# Altium PCB Mainboard V1.PcbDoc
Units mm, origin at the board's own origin, x right, y up, seen from the top; angles counter-clockwise.
Board outline 98 x 60 mm, 4 copper layers (Top Layer, Inner Layer1, Inner Layer2, Bottom Layer), stack 1.369 mm thick; 82 components, 104 nets, 322 pads, 53 vias.
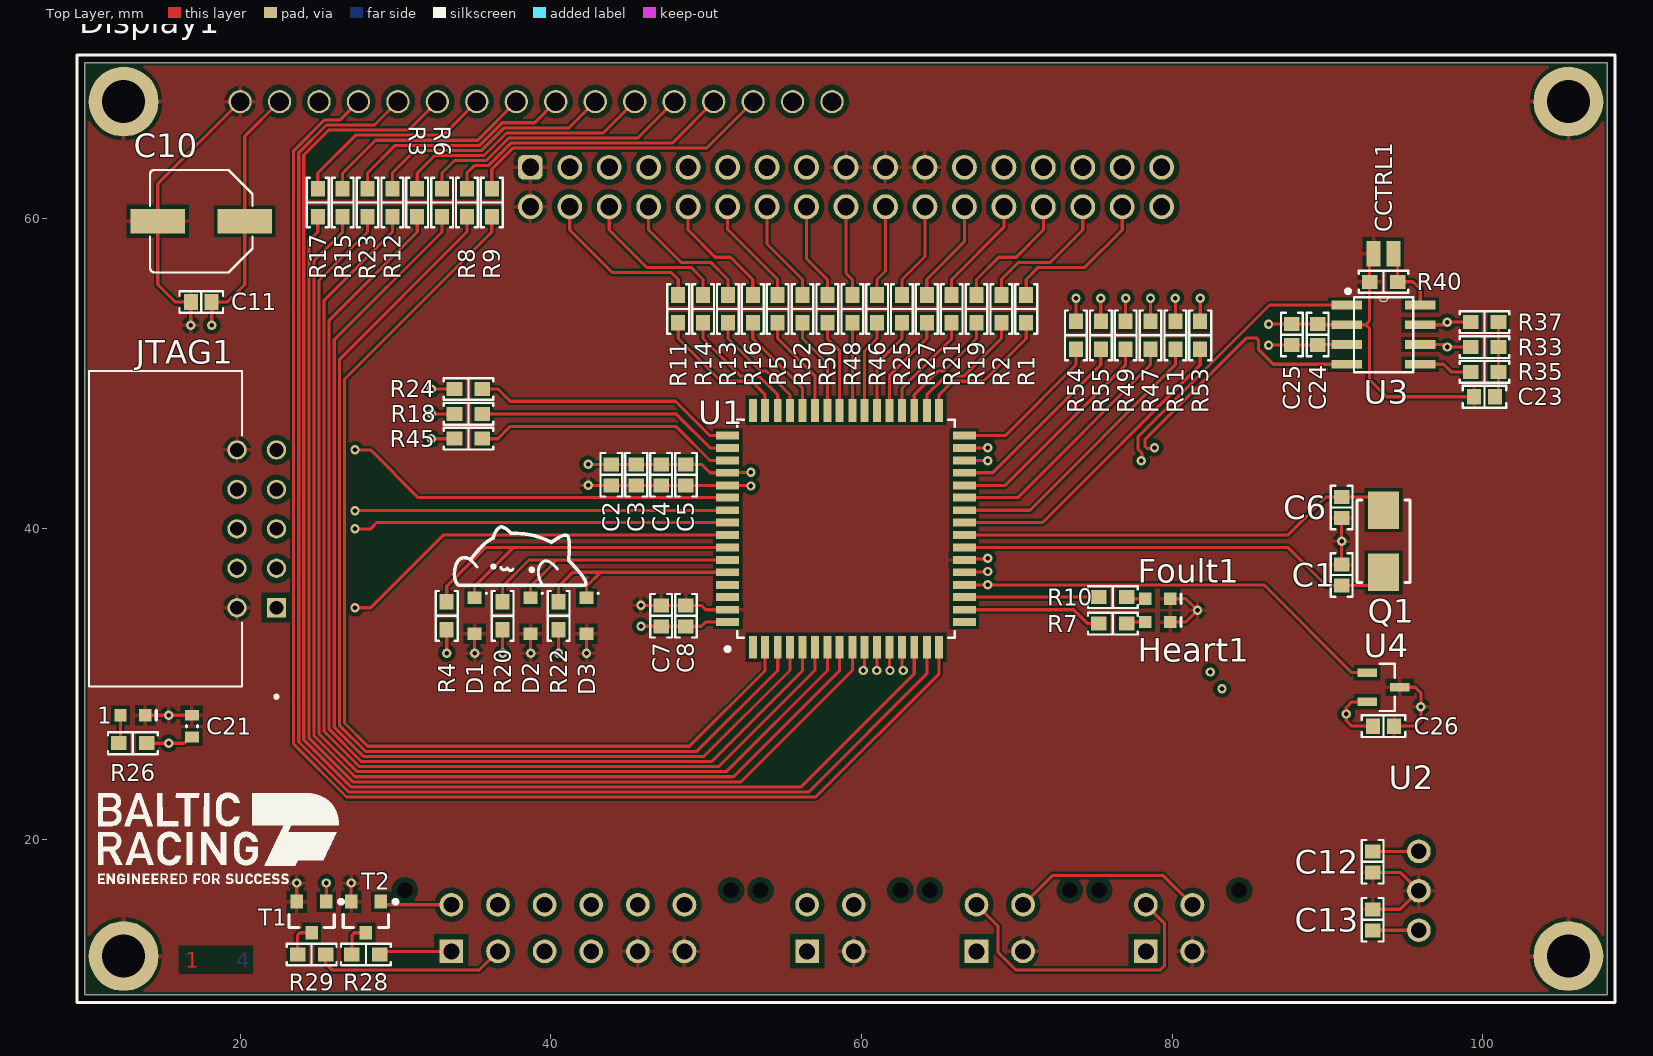
[diagram p0: Top Layer view]
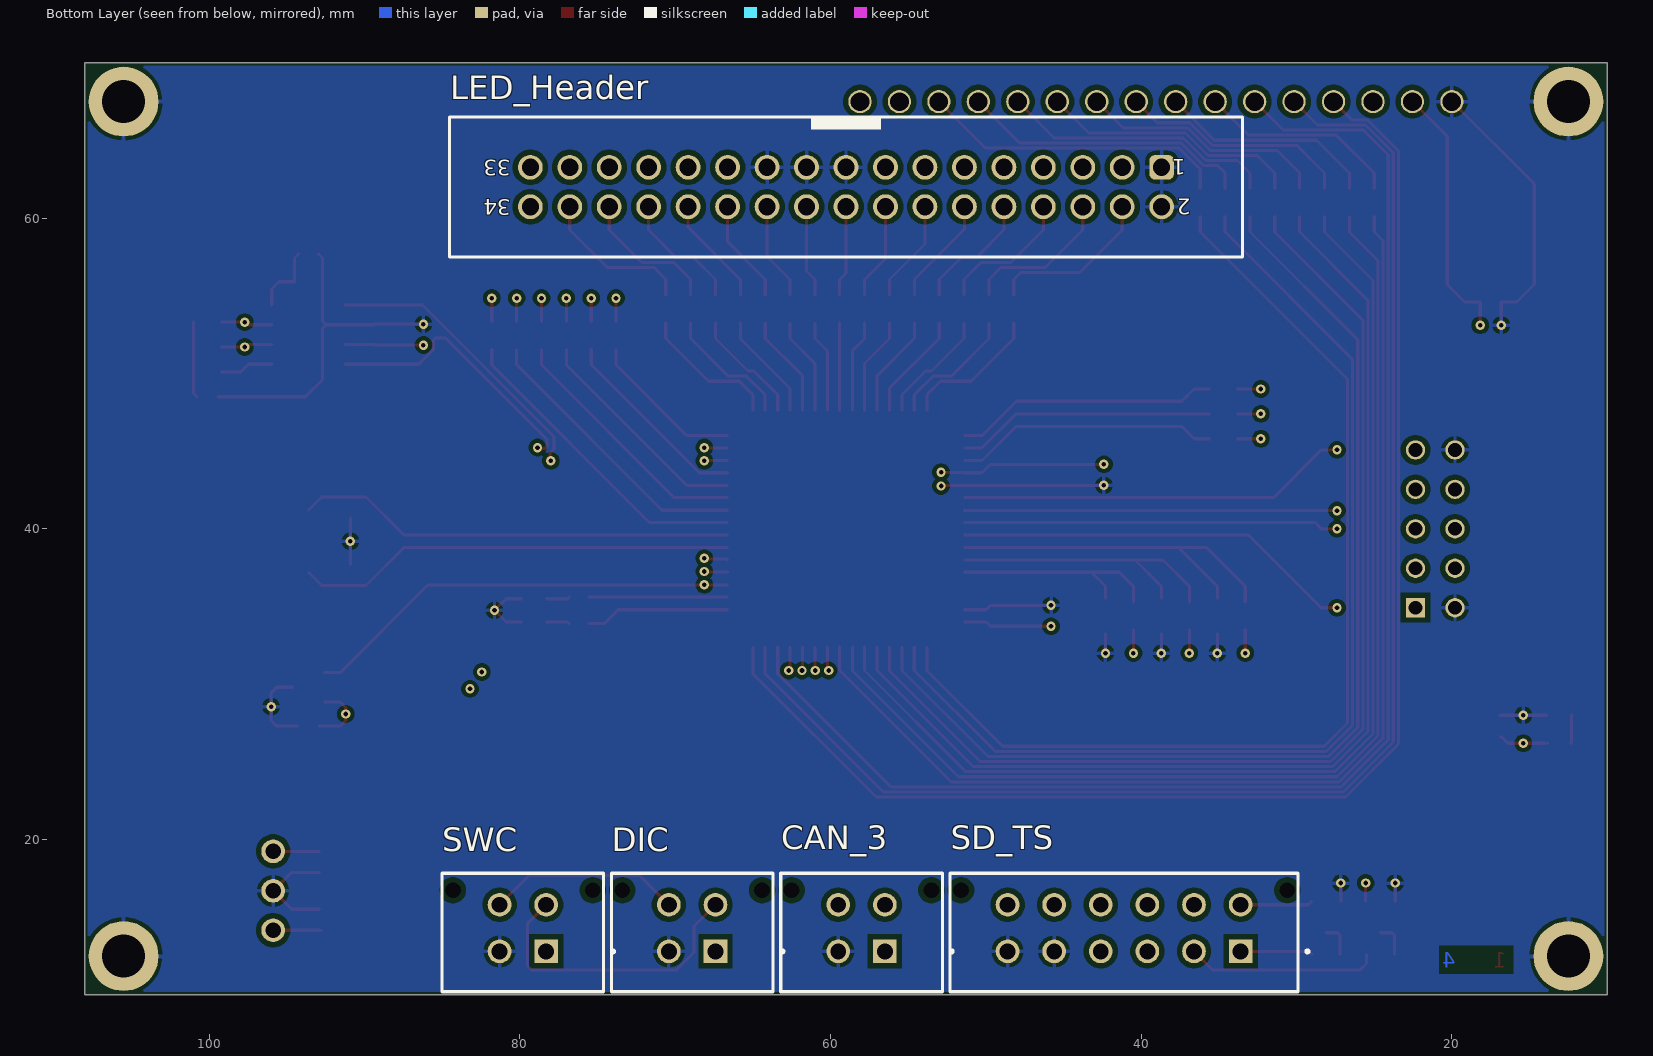
[diagram p1: Bottom Layer view, seen from below]
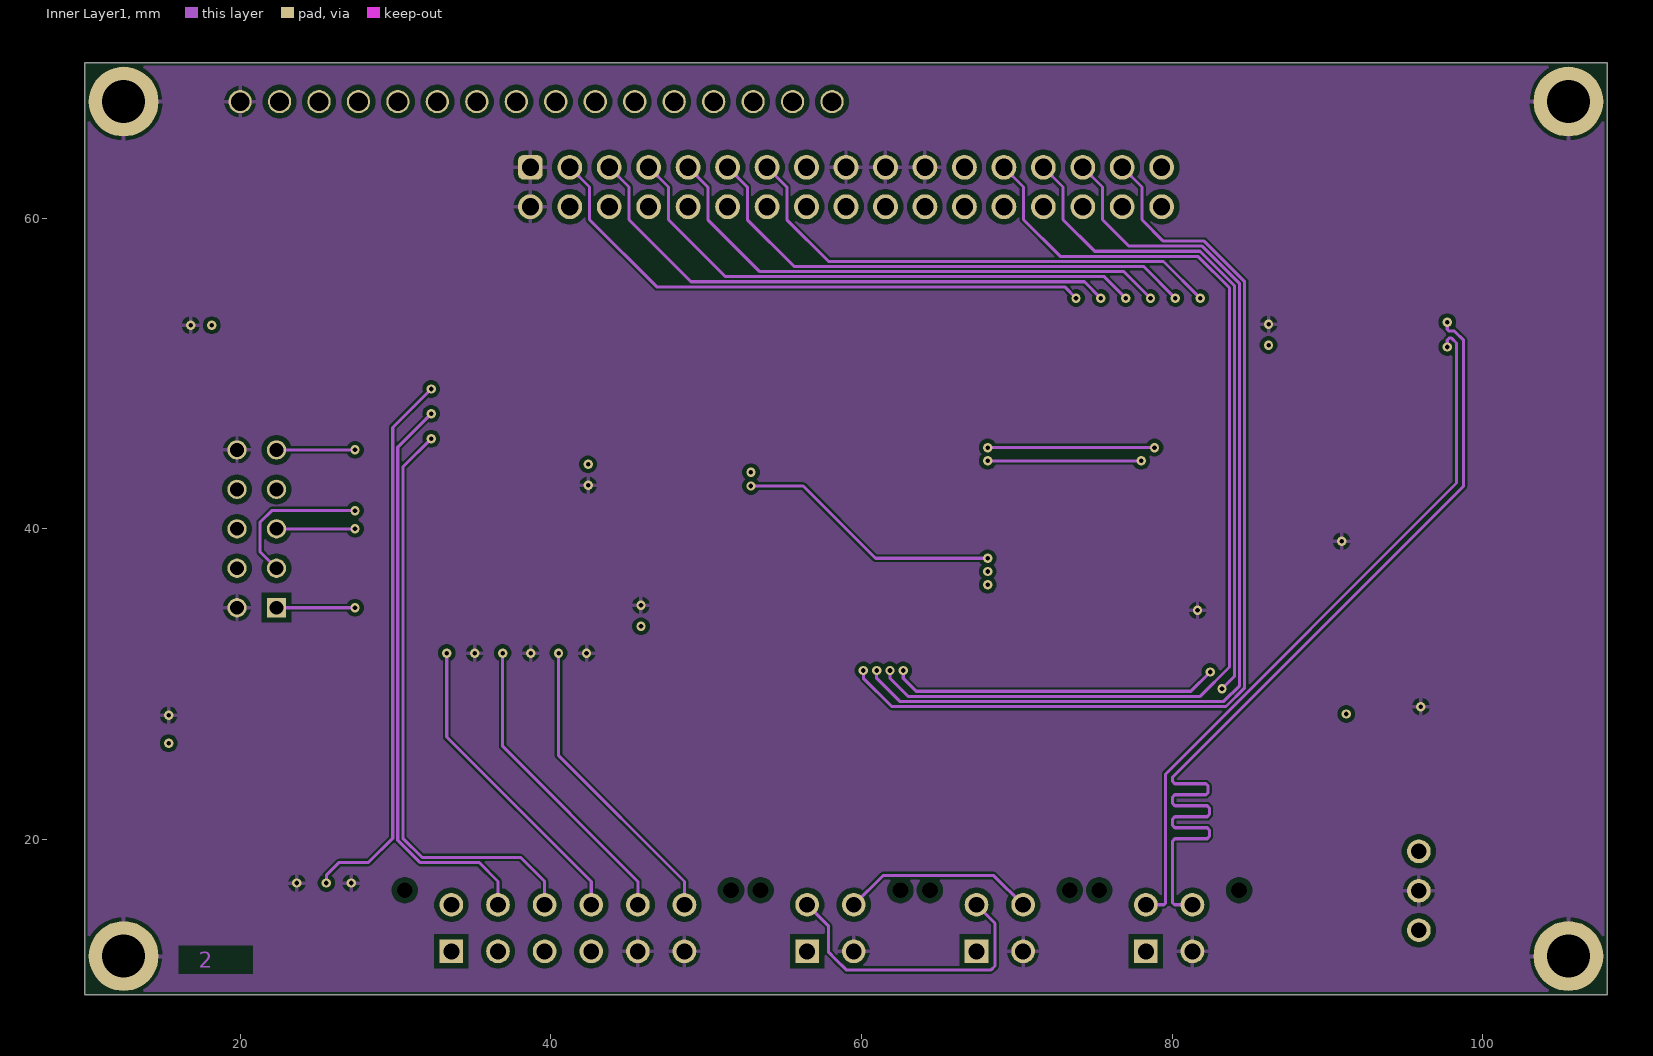
[diagram p2: Inner Layer1]
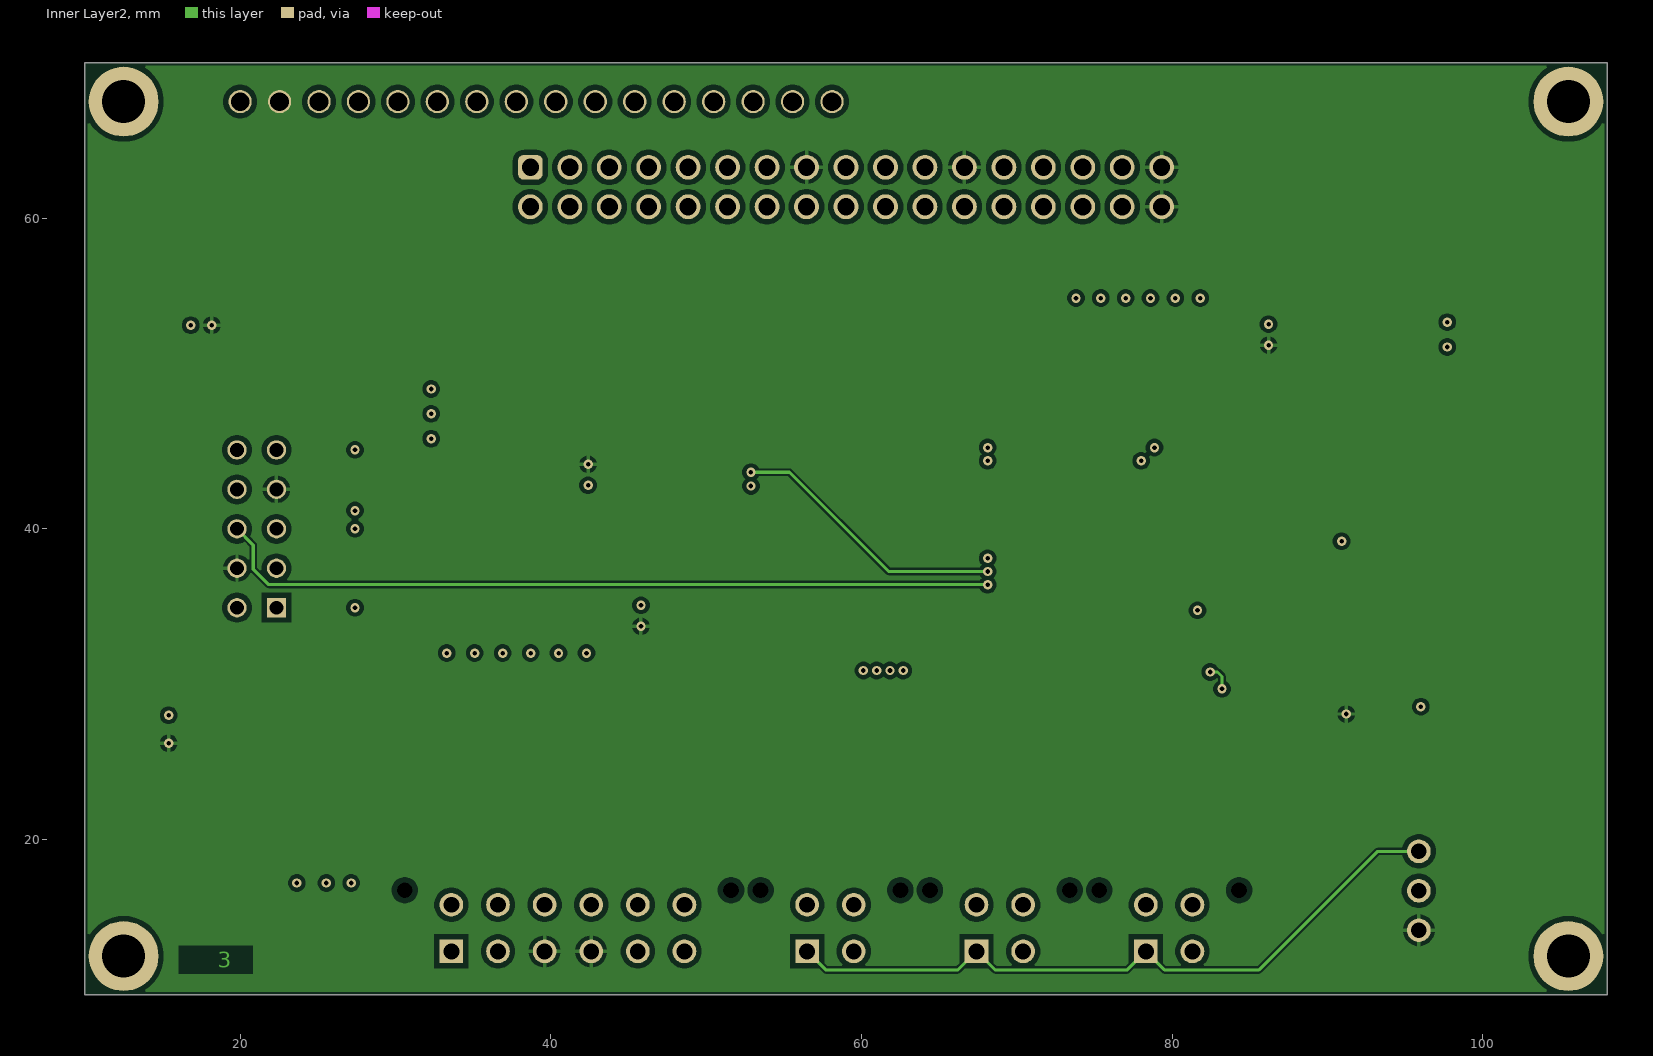
[diagram p3: Inner Layer2]
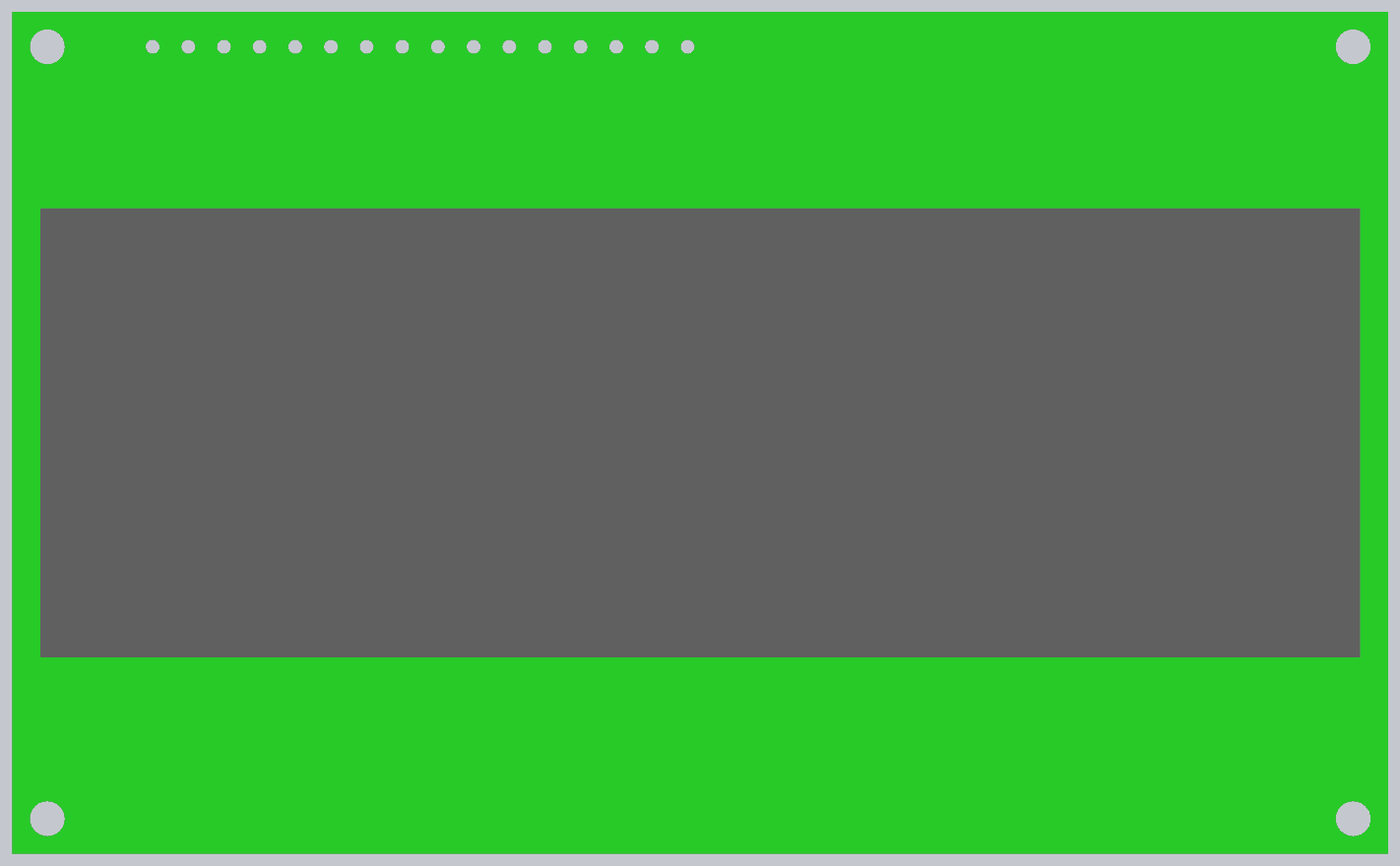
[diagram p4: 3D render of the assembled board from above, using the file's embedded part models]
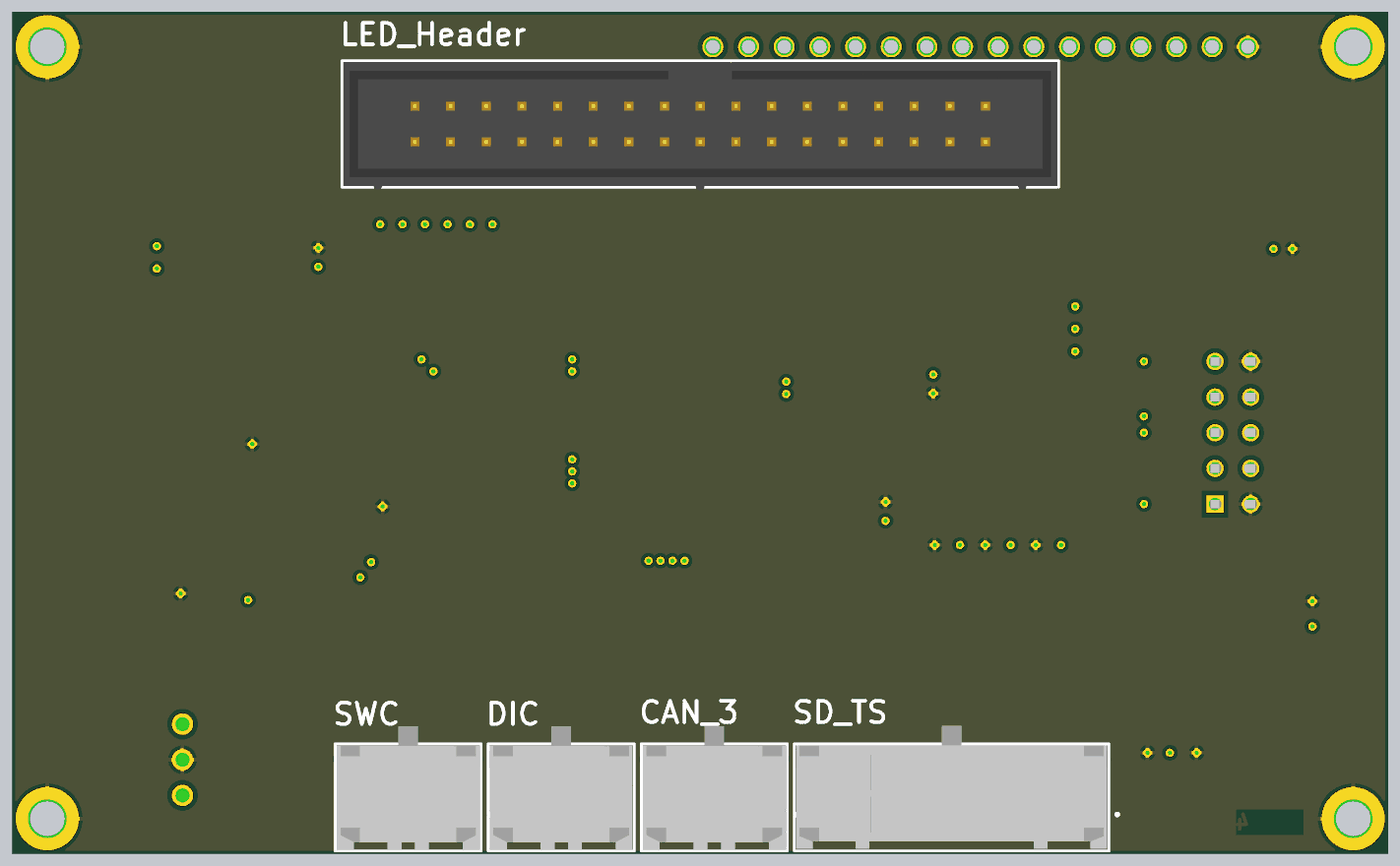
[diagram p5: 3D render of the assembled board from below, using the file's embedded part models]

## Layer stack, top to bottom
Top Solder: solder mask 0.0254, SM-001, Dk 4
Top Layer: signal copper 0.035
Dielectric 1: prepreg 0.1295, PP-017, Dk 4.3
Dielectric 2: prepreg 0.1295, PP-017, Dk 4.3
Inner Layer1: signal copper 0.035
Dielectric 3: core 0.7112, Core-039, Dk 4.8
Inner Layer2: signal copper 0.035
Dielectric 4: prepreg 0.1295, PP-017, Dk 4.3
Dielectric 5: prepreg 0.1295, PP-017, Dk 4.3
Bottom Layer: signal copper 0.035
Bottom Solder: solder mask 0.0254, SM-001, Dk 4

## Board outline
108,70 10,70 10,10 108,10

## Design rules (kind name [scope] priority, off if disabled: settings)
BoardOutlineClearance [All] p1: gap=0.2 ignorepadtopadclearanceinfootprint=FALSE // Trace to V-cut >0.4mm
Clearance [All] p1: gap=0.254 ignorepadtopadclearanceinfootprint=TRUE except(0: Arc-Hole Track-Hole SMDPad-Hole THPad-Hole Via-Hole Fill-Hole Poly-Hole Region-Hole Text-Hole; 0.127: Arc-Arc Arc-Track Arc-Fill Arc-Poly Arc-Region Track-Track Track-Fill Track-Poly Track-Region SMDPad-SMDPad; 0.15: Arc-Text Track-Text SMDPad-Text THPad-Text Via-Text Fill-Text Poly-Text Region-Text Text-Text; 0.2: Arc-SMDPad Track-SMDPad SMDPad-Fill SMDPad-Poly SMDPad-Region; 0.33: Arc-THPad Track-THPad THPad-Fill THPad-Poly THPad-Region; 0.5: SMDPad-THPad THPad-THPad THPad-Via)
DiffPairsRouting [All] p1: maxlimit=10 minlimit=0.254 mostfreqgap=0.254 toplayer_minwidth=0.127 toplayer_maxwidth=5 toplayer_prefwidth=0.254 midlayer1_minwidth=0.127 midlayer1_maxwidth=5 midlayer1_prefwidth=0.254 midlayer2_minwidth=0.127 midlayer2_maxwidth=5 midlayer2_prefwidth=0.254 bottomlayer_minwidth=0.127 bottomlayer_maxwidth=5 bottomlayer_prefwidth=0.254 maxuncoupledlength=12.7
HoleSize [All] p1: absolutevalues=TRUE maxlimit=6.3 minlimit=0.2 maxpercent=80.000 minpercent=20.000 // Finished hole size tolerance +0.13/-0.08mm
HoleToHoleClearance [All] p1: gap=0.5 allowstackedmicrovias=TRUE
MinimumAnnularRing [All] p1: minimumring=0.13 // 1oz Copper
PolygonConnect [All] p1: connectstyle=Relief reliefconductorwidth=0.254 reliefentries=4 polygonreliefangle="90 Angle" airgapwidth=0.254
RoutingVias [All] p1: holewidth=0.711 width=1.27 viastyle="Through Hole" minholewidth=0.3 minwidth=0.6 maxholewidth=0.711 maxwidth=1.27
SolderMaskExpansion [All] p1: expansion=0.05 istentingtop=FALSE
Width [All] p1: maxlimit=4.5 minlimit=0.09 preferedwidth=0.254 toplayer_minwidth=0.127 midlayer1_minwidth=0.127 midlayer2_minwidth=0.127 minimp=50.000000 maximp=50.000000 favimp=50.000000
27 further rules are at their usual default settings.

## Classes and differential pairs
differential pair uCAN: +uCAN_P -uCAN_N
differential pair CAN: +CAN_P -CAN_N

## Components (designator, comment, footprint, x,y, rotation, side; value= is the part's Value field where it differs from the comment)
1 "150060GS75000" 0603_A 13.1,28 r180 top
C1 "SMD Capacitor" "CAP 0603/1608" 90.9,37.025 r270 top value=18pF
C2 "SMD Capacitor" "CAP 0603/1608" 43.9,43.475 r90 top value=1uF
C3 "SMD Capacitor" "CAP 0603/1608" 45.5,43.475 r90 top value=100nF
C4 "SMD Capacitor" "CAP 0603/1608" 47.1,43.475 r90 top value=1uF
C5 "SMD Capacitor" "CAP 0603/1608" 48.7,43.475 r90 top value=100nF
C6 "SMD Capacitor" "CAP 0603/1608" 90.9,41.375 r90 top value=18pF
C7 "SMD Capacitor" "CAP 0603/1608" 47.1,34.4 r270 top value=1uF
C8 "SMD Capacitor" "CAP 0603/1608" 48.7,34.4 r270 top value=100nF
C10 "865060145006" WCAP-ASLL_6.3x7.7 17.5,59.8 r0 top value=220uF
C11 "SMD Capacitor" "CAP 0603/1608" 17.5,54.6 r180 top value=10uF
C12 "SMD Capacitor" "CAP 0603/1608" 92.9,18.565 r90 top value=2u2
C13 "SMD Capacitor" "CAP 0603/1608" 92.9,14.835 r270 top value=1uF
C21 "CAP 100nF 10V 0603(1608)" CAPC0603(1608)100_L 16.9,27.3 r90 top value=100nF
C23 "SMD Capacitor" "CAP 0603/1608" 100.1,48.5 r180 top value=4,7u
C24 "SMD Capacitor" "CAP 0603/1608" 89.354,52.5 r270 top value=100nF
C25 "SMD Capacitor" "CAP 0603/1608" 87.7,52.5 r270 top value=100nF
C26 "SMD Capacitor" "CAP 0603/1608" 93.6,27.3 r0 top value=1uF
CAN_3 "43045-0412" 43045-0412 58,14.3 r180 bottom
CCTRL1 "SMD Jumper open" SMD-JUMPER-OPEN 93.6,57.7 r0 top
D1 "MM3Z4V7T1G" SOD-323-2 35.1,34.4 r270 top
D2 "MM3Z4V7T1G" SOD-323-2 38.7,34.4 r270 top
D3 "MM3Z4V7T1G" SOD-323-2 42.3,34.4 r270 top
DIC "43045-0412" 43045-0412 68.9,14.3 r180 bottom
Display1 "EA_W204-XLG" EA_W204-XLG 9.5,9.5 r0 top
Foult1 "150060BS75000" 0603_A 79.075,35.5 r180 top
Heart1 "150060BS75000" 0603_A 79.075,34 r180 top
JTAG1 "5103311-1" TE_5103311-1 22.34,34.92 r90 top
LED_Header "61203421621" 61203421621 59,62 r0 bottom
Q1 "16M" "NDK NX5032GA" 93.6,39.2 r270 top
R1 "SMD Resistor" "STACKPOLE CSR0603" 70.6,54.15 r270 top value=1.8k
R2 "SMD Resistor" "STACKPOLE CSR0603" 69,54.15 r270 top value=1.8k
R3 "SMD Resistor" "STACKPOLE CSR0603" 31.4,61 r90 top value=10k
R4 "SMD Resistor" "STACKPOLE CSR0603" 33.3,34.4 r90 top value=10k
R5 "SMD Resistor" "STACKPOLE CSR0603" 54.6,54.15 r270 top value=390
R6 "SMD Resistor" "STACKPOLE CSR0603" 33,61 r90 top value=10k
R7 "SMD Resistor" "STACKPOLE CSR0603" 76.175,33.9 r0 top value=1.8k
R8 "SMD Resistor" "STACKPOLE CSR0603" 34.6,61 r270 top value=10k
R9 "SMD Resistor" "STACKPOLE CSR0603" 36.2,61 r270 top value=10k
R10 "SMD Resistor" "STACKPOLE CSR0603" 76.175,35.6 r0 top value=1.8k
R11 "SMD Resistor" "STACKPOLE CSR0603" 48.2,54.15 r90 top value=390
R12 "SMD Resistor" "STACKPOLE CSR0603" 29.8,61 r270 top value=10k
R13 "SMD Resistor" "STACKPOLE CSR0603" 51.4,54.15 r90 top value=390
R14 "SMD Resistor" "STACKPOLE CSR0603" 49.8,54.15 r90 top value=390
R15 "SMD Resistor" "STACKPOLE CSR0603" 26.6,61 r270 top value=10k
R16 "SMD Resistor" "STACKPOLE CSR0603" 53,54.15 r90 top value=390
R17 "SMD Resistor" "STACKPOLE CSR0603" 25,61 r270 top value=10k
R18 "SMD Resistor" "STACKPOLE CSR0603" 34.7,47.4 r0 top value=10k
R19 "SMD Resistor" "STACKPOLE CSR0603" 67.4,54.15 r270 top value=1.8k
R20 "SMD Resistor" "STACKPOLE CSR0603" 36.9,34.4 r90 top value=10k
R21 "SMD Resistor" "STACKPOLE CSR0603" 65.8,54.15 r270 top value=1.8k
R22 "SMD Resistor" "STACKPOLE CSR0603" 40.5,34.4 r90 top value=10k
R23 "SMD Resistor" "STACKPOLE CSR0603" 28.2,61 r90 top value=10k
R24 "SMD Resistor" "STACKPOLE CSR0603" 34.7,49 r180 top value=10k
R25 "SMD Resistor" "STACKPOLE CSR0603" 62.6,54.15 r90 top value=1.8k
R26 "SMD Resistor" "STACKPOLE CSR0603" 13.1,26.2 r180 top value=100
R27 "SMD Resistor" "STACKPOLE CSR0603" 64.2,54.15 r90 top value=1.8k
R28 "SMD Resistor" "STACKPOLE CSR0603" 28.1,12.6 r180 top value=270
R29 "SMD Resistor" "STACKPOLE CSR0603" 24.6,12.6 r180 top value=270
R33 "SMD Resistor" "STACKPOLE CSR0603" 100.1,51.7 r0 top value="60 0603"
R35 "SMD Resistor" "STACKPOLE CSR0603" 100.1,50.1 r0 top value="300 0603"
R37 "SMD Resistor" "STACKPOLE CSR0603" 100.1,53.3 r180 top value="60 0603"
R40 "SMD Resistor" "STACKPOLE CSR0603" 93.6,55.9 r0 top
R45 "SMD Resistor" "STACKPOLE CSR0603" 34.7,45.8 r180 top value=10k
R46 "SMD Resistor" "STACKPOLE CSR0603" 61,54.15 r270 top value=470
R47 "SMD Resistor" "STACKPOLE CSR0603" 81.8,52.45 r90 top value=560
R48 "SMD Resistor" "STACKPOLE CSR0603" 59.406,54.15 r270 top value=470
R49 "SMD Resistor" "STACKPOLE CSR0603" 78.6,52.45 r270 top value=560
R50 "SMD Resistor" "STACKPOLE CSR0603" 57.8,54.15 r270 top value=560
R51 "SMD Resistor" "STACKPOLE CSR0603" 80.2,52.45 r90 top value=560
R52 "SMD Resistor" "STACKPOLE CSR0603" 56.2,54.15 r270 top value=560
R53 "SMD Resistor" "STACKPOLE CSR0603" 77,52.45 r90 top value=560
R54 "SMD Resistor" "STACKPOLE CSR0603" 73.8,52.45 r90 top value=560
R55 "SMD Resistor" "STACKPOLE CSR0603" 75.4,52.45 r90 top value=560
SD_TS "43045-1212" 43045-1212 41.1,14.3 r180 bottom
SWC "43045-0412" 43045-0412 79.8,14.3 r180 bottom
T1 "BC848BLT1G" ONSC-SOT-23-3-318-08_V 24.6,15 r270 top
T2 "BC848BLT1G" ONSC-SOT-23-3-318-08_V 28.1,15 r270 top
U1 "AT90CAN128-16AI" *QFP80P1600X1600X120-64N 59,40 r90 top
U2 "R-78E05-1.0" SIP3_RECOM 98.123,16.7 r270 top
U3 "MCP2551/2561" *SOIC127P600X175-8N 93.6,52.5 r0 top
U4 "MCP130T-450I/TT" *SOT95P237X112-3N 93.6,29.8 r270 top

## Footprints (in the part's own frame and the unit in brackets; to place one, negate y for a bottom-side part, rotate by r counter-clockwise, add the part's x,y. Pads: shape width x height; smd on the part's side, far side on the other; paste and mask are expansions set on the pad)
0603_A [mm] "Chip LED, 2-Leads, Body 1.6x0.8mm, IPC Medium Density"
  rect 0.8x0.8 smd: 1(-0.8,0) 2(0.8,0)
  silkscreen extent -1.5,-0.3 -1.5,0.3, body extent -0.8,-0.4 0.8,0.4, height 0.7
43045-0412 [mm]
  rect 1.524x1.524 hole 1.02: 1(1.5,-1.5)
  round 1.524 hole 1.02: 2(-1.5,-1.5) 3(1.5,1.5) 4(-1.5,1.5)
  round 0 hole 1.02 unplated: ""(-4.5,2.44) ""(4.5,2.44)
  silkscreen extent -5.2,-4.1 5.9,3.53, body extent -5.07,-3.97 5.08,4.8, height 9.95
43045-1212 [mm]
  rect 1.524x1.524 hole 1.02: 1(7.5,-1.5)
  round 1.524 hole 1.02: 2(4.5,-1.5) 3(1.5,-1.5) 4(-1.5,-1.5) 5(-4.5,-1.5) 6(-7.5,-1.5) 7(7.5,1.5) 8(4.5,1.5) 9(1.5,1.5) 10(-1.5,1.5) 11(-4.5,1.5) 12(-7.5,1.5)
  round 0 hole 1.02 unplated: ""(-10.5,2.44) ""(10.5,2.44)
  silkscreen extent -11.2,-4.1 11.9,3.53, body extent -11.07,-3.94 11.07,4.83, height 9.95
61203421621 [mm] "34 pins, straight, gold plating"
  rrect50% 1.6x1.6 hole 1.1: 1(-20.32,-1.27)
  round 1.6 hole 1.1: 2(-20.32,1.27) 3(-17.78,-1.27) 4(-17.78,1.27) 5(-15.24,-1.27) 6(-15.24,1.27) 7(-12.7,-1.27) 8(-12.7,1.27) 9(-10.16,-1.27) 10(-10.16,1.27) 11(-7.62,-1.27) 12(-7.62,1.27) 13(-5.08,-1.27) 14(-5.08,1.27) 15(-2.54,-1.27) 16(-2.54,1.27) 17(0,-1.27) 18(0,1.27) 19(2.54,-1.27) 20(2.54,1.27) 21(5.08,-1.27) 22(5.08,1.27) 23(7.62,-1.27) 24(7.62,1.27) 25(10.16,-1.27) 26(10.16,1.27) 27(12.7,-1.27) 28(12.7,1.27) 29(15.24,-1.27) 30(15.24,1.27) 31(17.78,-1.27) 32(17.78,1.27) 33(20.32,-1.27) 34(20.32,1.27)
  silkscreen extent -25.52,-4.5 25.52,4.5, body extent -25.42,-4.42 25.42,4.75, height 9.13
*QFP80P1600X1600X120-64N [mil]
  rect 58x20 smd: 1(-300,236) 2(-300,205) 3(-300,173) 4(-300,142) 5(-300,110) 6(-300,79) 7(-300,47) 8(-300,16) 9(-300,-16) 10(-300,-47) 11(-300,-79) 12(-300,-110) 13(-300,-142) 14(-300,-173) 15(-300,-205) 16(-300,-236) 33(300,-236) 34(300,-205) 35(300,-173) 36(300,-142) 37(300,-110) 38(300,-79) 39(300,-47) 40(300,-16) 41(300,16) 42(300,47) 43(300,79) 44(300,110) 45(300,142) 46(300,173) 47(300,205) 48(300,236)
  rect 20x58 smd: 17(-236,-300) 18(-205,-300) 19(-173,-300) 20(-142,-300) 21(-110,-300) 22(-79,-300) 23(-47,-300) 24(-16,-300) 25(16,-300) 26(47,-300) 27(79,-300) 28(110,-300) 29(142,-300) 30(173,-300) 31(205,-300) 32(236,-300) 49(236,300) 50(205,300) 51(173,300) 52(142,300) 53(110,300) 54(79,300) 55(47,300) 56(16,300) 57(-16,300) 58(-47,300) 59(-79,300) 60(-110,300) 61(-142,300) 62(-173,300) 63(-205,300) 64(-236,300)
  silkscreen extent -310,-276 276,305, body extent -270,-270 270,270, height 30
*SOIC127P600X175-8N [mil]
  rect 78x22 smd: 1(-93,75) 2(-93,25) 3(-93,-25) 4(-93,-75) 5(93,-75) 6(93,-25) 7(93,25) 8(93,75)
  silkscreen extent -95,-95 75,115, body extent -75,-95 75,95, height 80
*SOT95P237X112-3N [mil]
  rect 22x50 smd: 1(-37,-41) 2(37,-41) 3(0,41)
  silkscreen extent -60,-10 60,28, body extent -60,-25 60,25, height 50
"CAP 0603/1608" [mm] "Chip Capacitor, 2-Leads, Body 1.60x0.80mm, IPC Medium Density"
  rect 0.9x1 smd: 1(-0.675,0) 2(0.675,0)
  silkscreen extent -1.4,-0.7 1.4,0.7, body extent -0.8,-0.41 0.8,0.41, height 0.82
CAPC0603(1608)100_L [mm] "Chip Capacitor, Body 1.6x0.8mm, Height 1.0mm, IPC High Density"
  rect 0.7x0.9 smd: 1(-0.7,0) 2(0.7,0)
  silkscreen extent -0.05,-0.35 0.05,0.35, body extent -0.87,-0.47 0.88,0.48, height 1
EA_W204-XLG [mm] "Display"
  round 1.5 hole 1.2: 1(10.5,58) 2(13.04,58) 3(15.58,58) 4(18.12,58) 5(20.66,58) 6(23.2,58) 7(25.74,58) 8(28.28,58) 9(30.82,58) 10(33.36,58) 11(35.9,58) 12(38.44,58) 13(40.98,58) 14(43.52,58) 15(46.06,58) 16(48.6,58)
  round 3.5 hole 2.75: NC(3,3) NC(3,58) NC(96,3) NC(96,58)
  silkscreen extent 0,0 99,61, body extent 0.5,0.5 98.5,60.5, height 17.4
"NDK NX5032GA" [mm] "Crystal, 2-Leads, Body 5.00x3.20mm, IPC Medium Density"
  rect 2.4x2 smd: 1(-2,0) 2(2,0)
  silkscreen extent -2.65,-1.7 2.65,1.7, body extent -2.5,-1.6 2.5,1.6, height 1.2
ONSC-SOT-23-3-318-08_V [mm]
  rect 0.9x0.8 smd: 1(-1,0.95) 2(-1,-0.95) 3(1,0)
  silkscreen extent -1.12,-1.46 0.65,2.03, body extent -0.65,-1.46 0.65,1.46, height 1.11
SIP3_RECOM [mm]
  round 1.524 hole 1: 1(-2.54,-2.25) 2(0,-2.25) 3(2.54,-2.25)
  body extent -5.75,-4.25 5.75,4.25, height 10.4
SMD-JUMPER-OPEN [mm] "Jumper, SMD"
  rect 0.9x1.65 smd: 1(-0.635,0) 2(0.635,0)
SOD-323-2 [mm] "SODFL, 2-Leads, Body 1,30x2,50mm, IPC Low Density"
  rect 0.8x0.9 smd: 1C(-1.15,0) 2A(1.15,0)
  silkscreen extent -1.5,0.7 -1.4,0.8, body extent -1.25,-0.72 1.25,0.72, height 1.15
"STACKPOLE CSR0603" [mm] "Chip Resistor, 2-Leads, Body 1.60x0.80mm, IPC Medium Density"
  rect 1x0.9 smd: 1(-0.9,0) 2(0.9,0)
  silkscreen extent -1.6,-0.7 1.6,0.7, body extent -0.85,-0.4 0.85,0.4, height 0.45
TE_5103311-1 [mm]
  rect 1.24x1.24 hole 0.89: 1(0,0)
  round 1.24 hole 0.89: 2(0,2.54) 3(2.54,0) 4(2.54,2.54) 5(5.08,0) 6(5.08,2.54) 7(7.62,0) 8(7.62,2.54) 9(10.16,0) 10(10.16,2.54)
  silkscreen extent -5.83,-0.1 15.24,12.08, body extent -5.08,-0.31 15.24,12.14, height 9.14
WCAP-ASLL_6.3x7.7 [mm] "Aluminium Electrolytic V-Chip SMT Capacitors, §¶6.3x7.7mm"
  rect 3.5x1.6 smd: 1(2.8,0) 2(-2.8,0)
  silkscreen extent -3.3,-3.3 3.3,3.3, body extent -3.65,-3.3 3.65,3.3, height 7.7

## Part data
1: library part CMP-1426-00002-1, "SMD mono-color Chip LED, WL-SMCW, Green", Color=Green, Manufacturer="Wuerth Elektronik", ComponentLink1Description="Manufacturer URL", ComponentLink1URL=http://www.we-online.com, ComponentLink2Description=Datasheet, ComponentLink2URL=http://katalog.we-online.com/led/datasheet/150060GS75000.pdf, PackageReference=0603_A, PartNumber=150060GS75000
C1 C2 C3 C4 C5 C6 C7 C8 C11 C12 C13 C23 C24 C25 C26: "Capacitor with multiple Footprints"
C10: "WCAP-ASLL Aluminum Electrolytic Capacitors, size Ф6.3x7.7mm, 6.3V DC, 220uF", Operating Temperature="-55 °C up to +105 °C", Rated Voltage="6.3V DC", ComponentLink1Description=Manufacturer, ComponentLink1URL=http://www.we-online.de, ComponentLink2Description=Datasheet, ComponentLink2URL=http://katalog.we-online.de/pbs/datasheet/865060145006.pdf, Life Cycle=2000h, Part Number=865060145006, Published Date="June 2017", Publisher="Wurth Elektronik", Size=Ф6.3x7.7mm
C21: library part CMP-1035-02579-1, "CAP 100nF 10V ±5% 0603 (1608 Metric) Thickness 1mm SMD", Case-EIA=0603, Case-Metric=1608, Rated Voltage="10 V", Tolerance=Â±5%, Max Thickness="1 mm", Technology=SMT
CAN_3 DIC SWC: "Micro-Fit 3.0 Vertical Header, 3.00mm Pitch, Dual Row, 4 Circuits, with PCB Polarizing Peg, Tin, Glow-Wire Capable, Black"
D1 D2 D3: "onsemi MM3Z4V7T1G / Z-Diode, 4,7V", ComponentLink1Description=Octopart, ComponentLink1URL=https://octopart.com/mm3z4v7t1g-onsemi-331144?r=sp
Display1: "Display"
Foult1: library part CMP-1426-00003-1, "SMD mono-color Chip LED, WL-SMCW, Blue", Color=Red, Manufacturer="Wuerth Elektronik", ComponentLink1Description="Manufacturer URL", ComponentLink1URL=http://www.we-online.com, ComponentLink2Description=Datasheet, ComponentLink2URL=http://katalog.we-online.com/led/datasheet/150060BS75000.pdf, PackageReference=0603_A, PartNumber=150060BS75000
Heart1: library part CMP-1426-00003-1, "SMD mono-color Chip LED, WL-SMCW, Blue", Color=Blue, Manufacturer="Wuerth Elektronik", ComponentLink1Description="Manufacturer URL", ComponentLink1URL=http://www.we-online.com, ComponentLink2Description=Datasheet, ComponentLink2URL=http://katalog.we-online.com/led/datasheet/150060BS75000.pdf, PackageReference=0603_A, PartNumber=150060BS75000
JTAG1: "AMP-LATCH Pin Header, Low Profile, 10 Pos., Right Angle PCB Mount, .100 X .100", Package=None, Arrow_Electronics-Purchase-URL=https://snapeda.com/shop?store=Arrow+Electronics&id=619176, Availability=Unavailable, Centerline_Pitch="2.54 mm[.1 in]", ComponentLink1Description=Datasheet, ComponentLink1URL=https://www.te.com/commerce/DocumentDelivery/DDEController?Action=showdoc&DocId=Catalog+Section%7F1307819_SECTION_5%7F0908%7Fpdf%7FEnglish%7FENG_CS_1307819_SECTION_5_0908.pdf%7F5103311-1, DigiKey-Purchase-URL=https://snapeda.com/shop?store=DigiKey&id=619176, EU_RoHS_Compliance=Compliant, MF="TE Connectivity", Mouser-Purchase-URL=https://snapeda.com/shop?store=Mouser&id=619176, MP=5103311-1, Number_of_Positions=10, Price=None, Product_Type=Connector, SnapEDA_Link=https://www.snapeda.com/parts/5103311-1/TE%20Connectivity%20AMP%20Connectors/view-part/619176/?ref=snap
LED_Header: "WR-BHD Box Header, Male PCB side, pitch 2.54mm, THT, Straight, 34p", Contact Resistance=20mOhm, Insulation Resistance=1000MOhm, Manufacturer="Wurth Elektronik", Operating Temperature="-40 to +105degC", Rated Current=3A, Withstanding Voltage=500VAC, Working Voltage=250VAC, ComponentLink1Description=Manufacturer, ComponentLink1URL=http://www.we-online.de, ComponentLink2Description=Datasheet, ComponentLink2URL=https://www.we-online.com/catalog/datasheet/61203421621.pdf, Gender="Male PCB side", Length=50.84mm, Manufacturer Part Number=61203421621, Mounting Technology=THT, Packaging=Tray, Pin Number=34, Pitch=2.54mm, Published Date="August 2021", System=Connector, Type=Straight
Q1: library part "16 MHz Quartz", "16 MHz Quartz"
R1 R2 R5 R11 R13 R14 R16 R19 R21 R25 R27 R46 R48 R50 R52: "Resistor with multiple footprints /  / 500R or 1kR depends on luminous intensity"
R3 R4 R6 R7 R8 R9 R10 R12 R15 R17 R18 R20 R22 R23 R24 R26 R28 R29 R33 R35 R37 R40 R45 R47 R49 R51 R53 R54 R55: "Resistor with multiple footprints"
SD_TS: "Micro-Fit 3.0 Vertical Header, 3.00mm Pitch, Dual Row, 12 Circuits, with PCB Polarizing Peg, Tin, Glow-Wire Capable, Black"
T1 T2: library part CMP-1048-00679-1, "General Purpose Transistor, NPN Silicon, 3-Pin SOT-23, Pb-Free, Tape and Reel", Manufacturer="On Semiconductor", Manufacturer 1="ON Semiconductor", ComponentLink1Description="Manufacturer URL", ComponentLink1URL=http://www.onsemi.com/, ComponentLink2Description=Datasheet, ComponentLink2URL=http://www.onsemi.cn/pub_link/Collateral/BC846ALT1-D.PDF, ComponentLink3Description="Package Specification", ComponentLink3URL=http://www.onsemi.cn/pub_link/Collateral/318-08.PDF, DatasheetVersion="Rev. 11", fT Min (MHz)=100, IC Continuous (A)=0.1, Manufacturer Part Number 1=BC848BLT1G, Mounting Technology="Surface Mount", PackageDescription="3-Pin Small Outline Transistor, Body 2.92 x 1.3 mm, Pitch 0.95 mm", PackageReference=SOT-23-3-318-08, PackageVersion="Rev. AP, 11/2009", Packing="Tape and Reel", PartNumber=BC848BLT1G, Polarity=NPN, RoHS=TRUE
U1: "Ic Mcu 8bit 128kb Flash 64tqfp", Package="TQFP-64 Microchip", Availability=Unavailable, ComponentLink1Description=Datasheet, ComponentLink1URL=https://ww1.microchip.com/downloads/en/DeviceDoc/doc7679.pdf, MF=Microchip, MP=AT90CAN128-16AI, Price=None, SnapEDA_Link=https://www.snapeda.com/parts/AT90CAN128-16AI/Microchip/view-part/?ref=snap
U2: "Nonisolated 5V Switchmode converter", ComponentLink1Description=Datasheet, ComponentLink1URL=https://recom-power.com/pdf/Innoline/R-78E-1.0.pdf
U3: library part MCP2551-I/SN, "MCP2551 Series 5.5 V 1 Mb/s Surface Mount High-Speed CAN Transceiver - SOIC-8", Package="SOIC-8 Microchip", Availability=Unavailable, ComponentLink1Description=Datasheet, ComponentLink1URL=http://ww1.microchip.com/downloads/en/devicedoc/20001667g.pdf, MF=Microchip, MP=MCP2551-I/SN, Price=None, SnapEDA_Link=https://www.snapeda.com/parts/MCP2551-I/SN/Microchip/view-part/?ref=snap
U4: "System Supervisors - Power Supply Monitors with Reset Generators Open Drain Low", Package="SOT-23-3 Microchip", Availability=Unavailable, ComponentLink1Description=Datasheet, ComponentLink1URL=https://ww1.microchip.com/downloads/en/DeviceDoc/11184d.pdf, MF=Microchip, MP=MCP120T-450I/TT, Price=None, SnapEDA_Link=https://www.snapeda.com/parts/MCP120T-450I/TT/Microchip/view-part/?ref=snap

## Free pads (board coordinates)
  round 4.5 hole 2.7: 6(12.5,12.5) 7(12.5,67.5) 8(105.5,67.5) 9(105.5,12.5)

## Via types
v1: diameter 0.6, hole 0.3, Top Layer to Bottom Layer, 53 vias

## Nets (pads, with @x,y where several pads share a name; then routed paths per layer and width w, separated by ;. In a path a pad name is that pad's centre, name@x,y a point inside that pad or via, vN(x,y) a via of type N, cw(c..) or ccw(c..) an arc to the next point about the centre after c; other vN are vias at no path point)
+5V: C2.2 C3.2 C4.2 C5.2 C7.2 C8.2 C10.1 C11.1 C13.2 C21.1 C24.2 C25.2 C26.1 Display1.2 JTAG1.4 JTAG1.7 LED_Header.15 LED_Header.23 LED_Header.33 LED_Header.34 R26.1 SD_TS.3 SD_TS.4 U1.21 U1.52 U1.64 U2.3 U3.3 U4.2 | length 67.9
  Top Layer w0.2: R26.1 v1(15.4,26.2) 16.4,26.2 16.8,26.6 C21.1 ; v1(18.175,53.1) C11.1 19.175,54.6 20.3,55.725 C10.1 20.3,65.26 Display1.2 ; v1(42.4,44.15) C2.2 C3.2 C4.2 C5.2 49.7,44.15 50.243,43.607 U1.52 51.397,43.624 52.863,43.624 v1(52.88,43.641) ; v1(45.8,33.725) C7.2 C8.2 49.7,33.725 49.981,34.006 U1.64 ; U1.21 66.641,37.227 68.099,37.227 v1(68.12,37.248) ; v1(86.2,51.825) C25.2 C24.2 89.394,51.865 U3.3 ; U4.2 91.559,28.86 91.2,28.501 v1(91.2,28.08) 91.2,27.659 91.559,27.3 C26.1 ; C13.2 U2.3
  Inner Layer2 w0.2: v1(52.88,43.641) 55.359,43.641 61.752,37.248 v1(68.12,37.248)
+24V: C12.2 CAN_3.1 DIC.1 SWC.1 U2.1 | length 48
  Top Layer w0.2: C12.2 U2.1
  Inner Layer2 w0.2: CAN_3.1 57.692,11.608 66.208,11.608 DIC.1 68.592,11.608 77.108,11.608 SWC.1 79.492,11.608 85.59,11.608 93.222,19.24 U2.1
batt_led_1: LED_Header.14 R52.1 | length 6.6
  Top Layer w0.2: LED_Header.14 53.92,58.33 56.2,56.05 R52.1
batt_led_2: LED_Header.16 R50.1 | length 6.2
  Top Layer w0.2: LED_Header.16 56.46,57.39 57.8,56.05 R50.1
batt_led_3: LED_Header.18 R48.1 | length 5.8
  Top Layer w0.2: LED_Header.18 59,56.456 59.406,56.05 R48.1
batt_led_4: LED_Header.20 R46.1 | length 5.9
  Top Layer w0.2: R46.1 61,56.05 61.54,56.59 LED_Header.20
batt_led_5: LED_Header.22 R25.2 | length 6.3
  Top Layer w0.2: R25.2 62.6,56.05 64.08,57.53 LED_Header.22
batt_led_6: LED_Header.24 R27.2 | length 6.7
  Top Layer w0.2: R27.2 64.2,56.05 66.62,58.47 LED_Header.24
batt_led_7: LED_Header.26 R21.1 | length 7.1
  Top Layer w0.2: R21.1 65.8,56.05 69.16,59.41 LED_Header.26
batt_led_8: LED_Header.28 R19.1 | length 8.1
  Top Layer w0.2: R19.1 67.4,56.05 68.831,57.481 69.951,57.481 71.7,59.23 LED_Header.28
batt_led_9: LED_Header.30 R2.1 | length 9.1
  Top Layer w0.2: R2.1 69,56.05 70.104,57.154 72.164,57.154 74.24,59.23 LED_Header.30
batt_led_10: LED_Header.32 R1.1 | length 10
  Top Layer w0.2: R1.1 70.6,56.05 71.377,56.827 74.377,56.827 76.78,59.23 LED_Header.32
BOTS_in: R4.1 SD_TS.10 | length 21.6
  Top Layer w0.2: v1(33.3,32) R4.1
  Inner Layer1 w0.2: v1(33.3,32) 33.3,26.6 42.6,17.3 SD_TS.10
BOTS_uC: D1.1C R4.2 U1.58 | length 24.4
  Top Layer w0.2: R4.2 33.3,36.3 35.806,38.806 37.606,38.806 ; D1.1C 35.1,36.3 37.606,38.806 ; U1.58 37.606,38.806
CAN_N: CAN_3.4 DIC.4 R37.2 SWC.4 U3.7 | length 88.4
  Top Layer w0.2: DIC.4 72.28,17.68 79.42,17.68 SWC.4 ; U3.7 97.427,53.135 97.592,53.3 v1(97.7,53.3) R37.2
  Inner Layer1 w0.2: CAN_3.4 61.38,17.68 68.52,17.68 DIC.4 ; SWC.4 80.144,15.8 80.027,15.917 80.027,19.1 80.027,19.908 80.169,20.05 82.249,20.05 82.391,20.191 82.391,20.616 82.249,20.758 80.169,20.758 80.027,20.899 80.027,21.324 80.169,21.466 82.249,21.466 82.391,21.607 82.391,22.032 82.249,22.174 80.169,22.174 80.027,22.315 80.027,22.74 80.169,22.882 82.169,22.882 82.31,23.023 82.31,23.448 82.169,23.59 80.169,23.59 80.027,23.731 80.027,24.029 98.754,42.756 98.754,52.144 98.171,52.727 97.817,52.727 97.7,52.844 v1(97.7,53.3)
CAN_P: CAN_3.3 DIC.3 R33.1 SWC.3 U3.6 | length 88.4
  Top Layer w0.2: DIC.3 68.78,14.42 68.78,12.737 69.208,12.309 69.208,12.306 69.906,11.608 79.24,11.608 79.492,11.86 79.492,14.608 SWC.3 ; U3.6 97.427,51.865 97.592,51.7 v1(97.7,51.7) R33.1
  Inner Layer1 w0.2: CAN_3.3 57.88,14.42 57.88,12.737 58.308,12.309 58.308,12.306 59.006,11.608 68.34,11.608 68.592,11.86 68.592,14.608 DIC.3 ; SWC.3 79.456,15.8 79.573,15.917 79.573,24.217 98.3,42.944 98.3,51.956 97.983,52.273 97.817,52.273 97.7,52.156 v1(97.7,51.7)
Display_1: Display1.7 R17.1 | length 13.1
  Top Layer w0.2: R17.1 25,62.9 27.439,65.339 33.079,65.339 Display1.7
Display_2: Display1.8 R15.1 | length 14.1
  Top Layer w0.2: R15.1 26.6,62.9 28.712,65.012 35.292,65.012 Display1.8
Display_3: Display1.9 R23.2 | length 15
  Top Layer w0.2: R23.2 28.2,62.9 29.985,64.685 35.427,64.685 36.877,66.135 38.955,66.135 Display1.9
Display_4: Display1.10 R12.1 | length 16
  Top Layer w0.2: R12.1 29.8,62.9 31.258,64.358 35.563,64.358 37.013,65.808 41.168,65.808 Display1.10
Display_5: Display1.11 R3.2 | length 16.9
  Top Layer w0.2: R3.2 31.4,62.9 32.531,64.031 35.698,64.031 37.148,65.481 43.381,65.481 Display1.11
Display_6: Display1.12 R6.2 | length 17.8
  Top Layer w0.2: R6.2 33,62.9 33.804,63.704 35.834,63.704 37.284,65.154 45.594,65.154 Display1.12
Display_7: Display1.13 R8.1 | length 18.8
  Top Layer w0.2: R8.1 34.6,62.9 35.077,63.377 35.969,63.377 37.419,64.827 47.807,64.827 Display1.13
Display_8: Display1.14 R9.1 | length 19.9
  Top Layer w0.2: R9.1 36.2,63.145 37.555,64.5 50.02,64.5 Display1.14
Enable: Display1.6 U1.14 | length 93
  Top Layer w0.2: Display1.6 30.866,65.666 25.7,65.666 24.1,64.066 24.1,26.413 27.124,23.389 56.116,23.389 63.394,30.667 U1.14
free_led_1: LED_Header.4 R11.2 | length 10.8
  Top Layer w0.2: LED_Header.4 41.22,59.23 43.95,56.5 47.75,56.5 48.2,56.05 R11.2
free_led_2: LED_Header.6 R14.2 | length 9.9
  Top Layer w0.2: LED_Header.6 43.76,59.23 46.163,56.827 49.023,56.827 49.8,56.05 R14.2
free_led_3: LED_Header.8 R13.2 | length 8.9
  Top Layer w0.2: LED_Header.8 46.3,59.23 48.376,57.154 50.296,57.154 51.4,56.05 R13.2
free_led_4: LED_Header.10 R16.2 | length 8
  Top Layer w0.2: LED_Header.10 48.84,59.23 50.589,57.481 51.569,57.481 53,56.05 R16.2
free_led_5: LED_Header.12 R5.1 | length 7
  Top Layer w0.2: LED_Header.12 51.38,59.27 54.6,56.05 R5.1
GND: 1.1 C1.1 C2.1 C3.1 C4.1 C5.1 C6.1 C7.1 C8.1 C10.2 C11.2 C12.1 C13.1 C21.2 C23.2 C24.1 C25.1 C26.2 CAN_3.2 CCTRL1.1 D1.2A D2.2A D3.2A DIC.2 Display1.1 Display1.NC Foult1.1 Heart1.1 JTAG1.2 JTAG1.10 LED_Header.1 LED_Header.2 LED_Header.17 LED_Header.19 LED_Header.21 pad.6 pad.7 pad.8 pad.9 R40.1 SD_TS.5 SD_TS.6 SWC.2 T1.2 T2.2 U1.22 U1.53 U1.63 U2.2 U3.2 U4.3 | length 103.3
  Top Layer w0.2: 1.1 v1(15.4,28) C21.2 ; v1(16.825,53.1) C11.2 15.825,54.6 14.7,55.725 C10.2 14.7,62.2 Display1.1 ; T1.2 v1(23.65,17.2) ; T2.2 v1(27.15,17.2) ; v1(35.1,32) D1.2A ; v1(38.7,32) D2.2A ; v1(42.3,32) D3.2A ; v1(42.4,42.8) C2.1 C3.1 C4.1 C5.1 48.706,42.794 U1.53 51.397,42.777 52.863,42.777 v1(52.88,42.76) ; v1@45.692,35.075 v1(45.8,35.075) C7.1 C8.1 49.7,35.075 49.982,34.793 U1.63 ; U1.22 66.674,38.048 68.066,38.048 v1(68.12,38.102) ; Heart1.1 80.875,34 v1(81.625,34.75) 80.875,35.5 Foult1.1 ; v1(86.2,53.175) C25.1 C24.1 89.394,53.135 U3.2 92.465,53.135 ; C1.1 v1(90.9,39.2) C6.1 ; C13.1 94.683,15.51 U2.2 94.683,17.89 C12.1 ; CCTRL1.1 92.7,57.435 R40.1 92.7,53.37 92.465,53.135 ; C26.2 95.641,27.3 96,27.659 v1(96,28.55) 96,29.441 95.641,29.8 U4.3 ; C23.2 93.8,48.5 92.7,49.6 92.7,52.9 92.465,53.135
  Inner Layer1 w0.2: v1(52.88,42.76) 56.24,42.76 60.898,38.102 v1(68.12,38.102)
Inertia_in: R20.1 SD_TS.11 | length 21.3
  Top Layer w0.2: v1(36.9,32) R20.1
  Inner Layer1 w0.2: v1(36.9,32) 36.9,26 45.6,17.3 SD_TS.11
Inertia_uC: D2.1C R20.2 U1.59 | length 19.3
  Top Layer w0.2: R20.2 36.9,36.3 38.593,37.993 40.393,37.993 ; D2.1C 38.7,36.3 40.393,37.993 ; U1.59 40.393,37.993
info_led_1: LED_Header.13 R47.2 | length 34.1
  Top Layer w0.2: R47.2 v1(81.8,54.85)
  Inner Layer1 w0.2: LED_Header.13 55.19,62 55.19,59.9 57.879,57.211 79.439,57.211 v1(81.8,54.85)
info_led_2: LED_Header.11 R51.2 | length 35
  Top Layer w0.2: R51.2 v1(80.2,54.85)
  Inner Layer1 w0.2: LED_Header.11 52.65,62 52.65,59.9 55.666,56.884 78.166,56.884 v1(80.2,54.85)
info_led_3: LED_Header.9 R49.1 | length 36
  Top Layer w0.2: R49.1 v1(78.6,54.85)
  Inner Layer1 w0.2: LED_Header.9 50.11,62 50.11,59.9 53.453,56.557 76.893,56.557 v1(78.6,54.85)
info_led_4: LED_Header.7 R53.2 | length 36.9
  Top Layer w0.2: R53.2 v1(77,54.85)
  Inner Layer1 w0.2: LED_Header.7 47.57,62 47.57,59.9 51.24,56.23 75.62,56.23 v1(77,54.85)
info_led_5: LED_Header.5 R55.2 | length 37.9
  Top Layer w0.2: R55.2 v1(75.4,54.85)
  Inner Layer1 w0.2: LED_Header.5 45.03,62 45.03,59.9 49.027,55.903 74.347,55.903 v1(75.4,54.85)
info_led_6: LED_Header.3 R54.2 | length 38.8
  Top Layer w0.2: R54.2 v1(73.8,54.85)
  Inner Layer1 w0.2: LED_Header.3 42.49,62 42.49,59.9 46.814,55.576 73.074,55.576 v1(73.8,54.85)
JTAG_TCK: JTAG1.1 U1.57 | length 31
  Top Layer w0.2: v1(27.4,34.92) 28.4,34.92 33.074,39.594 U1.57
  Inner Layer1 w0.2: JTAG1.1 v1(27.4,34.92)
JTAG_TDI: JTAG1.9 U1.54 | length 30.3
  Top Layer w0.2: v1(27.4,45.08) 28.4,45.08 31.473,42.007 U1.54
  Inner Layer1 w0.2: JTAG1.9 v1(27.4,45.08)
JTAG_TDO: JTAG1.3 U1.55 | length 33.8
  Top Layer w0.2: v1(27.4,41.173) 27.41,41.183 51.37,41.183 U1.55
  Inner Layer1 w0.2: JTAG1.3 21.29,38.51 21.29,40.435 22.028,41.173 v1(27.4,41.173)
JTAG_TMS: JTAG1.5 U1.56 | length 29.2
  Top Layer w0.2: v1(27.4,40) 28.4,40 28.806,40.406 U1.56
  Inner Layer1 w0.2: JTAG1.5 v1(27.4,40)
MISO: LED_Header.27 U1.13 | length 67.3
  Top Layer w0.2: U1.13 62.607,30.955 v1(62.682,30.88)
  Inner Layer1 w0.2: v1(62.682,30.88) 62.682,30.38 63.516,29.546 81.199,29.546 v1(82.44,30.787) ; LED_Header.27 72.97,62 72.97,59.9 75.005,57.865 81.785,57.865 84.008,55.642 84.008,30.502 v1(83.203,29.697)
  Inner Layer2 w0.2: v1(82.44,30.787) 82.913,30.787 83.203,30.497 v1(83.203,29.697)
MOSI: LED_Header.25 U1.12 | length 68.5
  Top Layer w0.2: U1.12 61.794,30.914 v1(61.828,30.88)
  Inner Layer1 w0.2: v1(61.828,30.88) 61.828,30.38 62.989,29.219 81.797,29.219 83.681,31.103 83.681,55.506 81.649,57.538 72.792,57.538 70.43,59.9 70.43,62 LED_Header.25
Net1_2: 1.2 R26.2 | length 1.8
  Top Layer w0.2: 1.2 12.3,26.25 R26.2@12.35,26.2
NetC1_2: C1.2 Q1.2 U1.23 | length 28.3
  Top Layer w0.2: U1.23 87.444,38.806 89.9,36.35 C1.2 92.75,36.35 Q1.2
NetC6_2: C6.2 Q1.1 U1.24 | length 28.3
  Top Layer w0.2: U1.24 87.444,39.594 89.9,42.05 C6.2 92.75,42.05 Q1.1
NetC23_1: C23.1 R33.2 R35.2 R37.1 | length 4.9
  Top Layer w0.2: C23.1 101,48.725 R35.2 R33.2 R37.1
NetCCTRL1_2: CCTRL1.2 R40.2 U3.8 | length 4.6
  Top Layer w0.2: CCTRL1.2 94.5,57.435 R40.2 95.5,55.9 95.962,55.438 U3.8
NetFoult1_2: Foult1.2 R10.2 | length 1.5
  Top Layer w0.2: R10.2@76.8,35.6 76.9,35.5 Foult1.2
NetHeart1_2: Heart1.2 R7.2 | length 1.5
  Top Layer w0.2: R7.2@76.8,33.9 76.9,34 Heart1.2
NetR1_2: R1.2 U1.33 | length 9.1
  Top Layer w0.2: U1.33 64.994,48.62 65.874,49.5 67.85,49.5 70.6,52.25 R1.2
NetR2_2: R2.2 U1.34 | length 8.3
  Top Layer w0.2: U1.34 64.207,48.62 65.414,49.827 66.577,49.827 69,52.25 R2.2
NetR3_1: R3.1 U1.5 | length 70.6
  Top Layer w0.2: R3.1 31.4,59.1 25.735,53.435 25.735,27.09 27.801,25.024 50.35,25.024 56.206,30.88 U1.5
NetR5_2: R5.2 U1.43 | length 6.6
  Top Layer w0.2: R5.2 54.6,52.25 56.993,49.857 U1.43
NetR6_1: R6.1 U1.4 | length 69.6
  Top Layer w0.2: R6.1 33,59.1 26.062,52.162 26.062,27.225 27.936,25.351 49.864,25.351 55.393,30.88 U1.4
NetR7_1: R7.1 U1.18 | length 9.3
  Top Layer w0.2: U1.18 73.657,34.793 74.55,33.9 R7.1@75.55,33.9
NetR8_2: R8.2 U1.3 | length 68.7
  Top Layer w0.2: R8.2 34.6,59.1 26.389,50.889 26.389,27.361 28.072,25.678 49.404,25.678 54.606,30.88 U1.3
NetR9_2: R9.2 U1.2 | length 67.7
  Top Layer w0.2: R9.2 36.2,59.1 26.716,49.616 26.716,27.496 28.207,26.005 48.918,26.005 53.793,30.88 U1.2
NetR10_1: R10.1 U1.19 | length 8.9
  Top Layer w0.2: U1.19 75.544,35.606 R10.1@75.55,35.6
NetR11_1: R11.1 U1.47 | length 9.1
  Top Layer w0.2: R11.1 48.2,52.25 50.95,49.5 52.913,49.5 53.793,48.62 U1.47
NetR12_2: R12.2 U1.6 | length 71.5
  Top Layer w0.2: R12.2 29.8,59.1 25.408,54.708 25.408,26.954 27.665,24.697 50.81,24.697 56.993,30.88 U1.6
NetR13_1: R13.1 U1.45 | length 7.5
  Top Layer w0.2: R13.1 51.4,52.25 53.496,50.154 53.859,50.154 55.393,48.62 U1.45
NetR14_1: R14.1 U1.46 | length 8.3
  Top Layer w0.2: R14.1 49.8,52.25 52.223,49.827 53.399,49.827 54.606,48.62 U1.46
NetR15_2: R15.2 U1.8 | length 73.4
  Top Layer w0.2: R15.2 26.6,59.1 24.754,57.254 24.754,26.684 27.395,24.043 51.757,24.043 58.594,30.88 U1.8
NetR16_1: R16.1 U1.44 | length 7
  Top Layer w0.2: R16.1 53,52.25 56.206,49.044 U1.44
NetR17_2: R17.2 U1.9 | length 74.4
  Top Layer w0.2: R17.2 25,59.1 24.427,58.527 24.427,26.548 27.259,23.716 52.242,23.716 59.406,30.88 U1.9
NetR18_2: R18.2 U1.50 | length 16.7
  Top Layer w0.2: R18.2 48.05,47.4 50.243,45.207 U1.50
NetR19_2: R19.2 U1.35 | length 7.5
  Top Layer w0.2: U1.35 63.394,48.62 64.928,50.154 65.304,50.154 67.4,52.25 R19.2
NetR21_2: R21.2 U1.36 | length 7
  Top Layer w0.2: U1.36 62.607,49.057 65.8,52.25 R21.2
NetR23_1: R23.1 U1.7 | length 72.5
  Top Layer w0.2: R23.1 28.2,59.1 25.081,55.981 25.081,26.819 27.53,24.37 51.296,24.37 57.806,30.88 U1.7
NetR24_1: R24.1 U1.49 | length 17
  Top Layer w0.2: R24.1 36.6,49 37.387,48.213 48.024,48.213 50.243,45.994 U1.49
NetR25_1: R25.1 U1.38 | length 6.3
  Top Layer w0.2: U1.38 61.007,50.657 62.6,52.25 R25.1
NetR27_1: R27.1 U1.37 | length 6.6
  Top Layer w0.2: U1.37@61.794,47.606 U1.37 61.794,49.844 64.2,52.25 R27.1
NetR28_2: R28.2 T2.3 | length 2.2
  Top Layer w0.2: R28.2 27.2,13.85 27.35,14 T2.3
NetR29_2: R29.2 T1.3 | length 2.2
  Top Layer w0.2: R29.2 23.7,13.85 23.85,14 T1.3
NetR35_1: R35.1 U3.5 | length 3.4
  Top Layer w0.2: U3.5 97.462,50.595 97.957,50.1 R35.1
NetR45_1: R45.1 U1.51 | length 17
  Top Layer w0.2: R45.1 36.6,45.8 37.397,46.597 48.04,46.597 50.243,44.394 U1.51
NetR46_2: R46.2 U1.39 | length 6
  Top Layer w0.2: U1.39 60.194,51.444 61,52.25 R46.2
NetR47_1: R47.1 U1.25 | length 20.4
  Top Layer w0.2: U1.25 71.656,40.406 81.8,50.55 R47.1
NetR48_2: R48.2 U1.40 | length 5.6
  Top Layer w0.2: U1.40 R48.2
NetR49_2: R49.2 U1.27 | length 16.5
  Top Layer w0.2: U1.27 70.057,42.007 78.6,50.55 R49.2
NetR50_2: R50.2 U1.41 | length 6
  Top Layer w0.2: R50.2 57.8,52.25 58.594,51.456 U1.41
NetR51_1: R51.1 U1.26 | length 18.5
  Top Layer w0.2: U1.26 70.844,41.194 80.2,50.55 R51.1
NetR52_2: R52.2 U1.42 | length 6.3
  Top Layer w0.2: R52.2 56.2,52.25 57.806,50.644 U1.42
NetR53_1: R53.1 U1.28 | length 14.6
  Top Layer w0.2: U1.28 69.244,42.794 77,50.55 R53.1
NetR54_1: R54.1 U1.32 | length 10.1
  Top Layer w0.2: U1.32 69.244,45.994 73.8,50.55 R54.1
NetR55_1: R55.1 U1.29 | length 12.7
  Top Layer w0.2: U1.29 68.457,43.607 75.4,50.55 R55.1
Read_Write: Display1.5 U1.15 | length 92.3
  Top Layer w0.2: Display1.5 28.653,65.993 25.565,65.993 23.773,64.201 23.773,26.277 26.988,23.062 56.602,23.062 64.207,30.667 U1.15
Register_Select: Display1.4 U1.16 | length 91.6
  Top Layer w0.2: Display1.4 26.44,66.32 25.429,66.32 23.446,64.337 23.446,26.142 26.853,22.735 57.062,22.735 64.994,30.667 U1.16
Reset_uC: JTAG1.6 U1.20 U4.1 | length 79
  Top Layer w0.2: U1.20 v1(68.12,36.393) 85.906,36.393 91.559,30.74 U4.1
  Inner Layer2 w0.2: JTAG1.6 20.85,38.95 20.85,37.4 21.84,36.41 68.103,36.41 v1(68.12,36.393)
SCK: LED_Header.29 U1.11 | length 66.7
  Top Layer w0.2: v1(60.973,30.88) 61.007,30.914 U1.11
  Inner Layer1 w0.2: v1(60.973,30.88) 60.973,30.38 62.461,28.892 83.323,28.892 84.335,29.904 84.335,55.777 81.92,58.192 77.218,58.192 75.51,59.9 75.51,62 LED_Header.29
SDB_Dashboard_In: R22.1 SD_TS.12 | length 21.1
  Top Layer w0.2: v1(40.5,32) R22.1
  Inner Layer1 w0.2: v1(40.5,32) 40.5,25.4 48.6,17.3 SD_TS.12
SDB_Dashboard_uC: D3.1C R22.2 U1.60 | length 14.3
  Top Layer w0.2: R22.2 40.5,36.3 41.406,37.206 43.206,37.206 ; D3.1C 42.3,36.3 43.206,37.206 ; U1.60 43.206,37.206
SS: LED_Header.31 U1.10 | length 66.1
  Top Layer w0.2: v1(60.119,30.88) 60.194,30.955 U1.10
  Inner Layer1 w0.2: v1(60.119,30.88) 60.119,30.38 61.934,28.565 83.458,28.565 84.662,29.769 84.662,55.913 82.056,58.519 79.431,58.519 78.05,59.9 78.05,62 LED_Header.31
Start_LED_Ctrl: R24.2 T1.1 | length 38.4
  Top Layer w0.2: T1.1 v1(25.55,17.2) ; v1(32.3,49) R24.2
  Inner Layer1 w0.2: v1(25.55,17.2) 25.55,17.7 26.377,18.527 28.265,18.527 29.823,20.085 29.823,46.523 v1(32.3,49)
Start_LED_Return: R29.1 SD_TS.2 | length 12.3
  Top Layer w0.2: R29.1 25.5,12.016 25.908,11.608 35.408,11.608 SD_TS.2
TS_On_Button: R45.2 SD_TS.9 | length 39.7
  Top Layer w0.2: v1(32.3,45.8) R45.2
  Inner Layer1 w0.2: v1(32.3,45.8) 30.477,43.977 30.477,20.085 31.708,18.854 38.046,18.854 39.6,17.3 SD_TS.9
TS_On_Return: R28.1 SD_TS.1 | length 4.7
  Top Layer w0.2: R28.1 29.2,12.8 SD_TS.1
TS_Start_Button: R18.1 SD_TS.8 | length 38.9
  Top Layer w0.2: v1(32.3,47.4) R18.1
  Inner Layer1 w0.2: v1(32.3,47.4) 30.15,45.25 30.15,19.95 31.573,18.527 35.373,18.527 36.6,17.3 SD_TS.8
TSAL_In: SD_TS.7 T2.1 | length 4.6
  Top Layer w0.2: T2.1 29.25,15.8 SD_TS.7
uCAN_N: U1.31 U3.4 | length 30.1
  Top Layer w0.2: U1.31 68.099,45.207 v1(68.12,45.228) ; v1(78.855,45.228) 78.804,45.177 78.372,45.177 78.255,45.294 78.255,45.755 84.773,52.273 85.429,52.273 85.546,52.156 85.546,51.554 86.505,50.595 U3.4
  Inner Layer1 w0.2: v1(68.12,45.228) v1(78.855,45.228)
uCAN_P: U1.30 U3.1 | length 30
  Top Layer w0.2: U1.30 68.099,44.394 v1(68.12,44.373) ; v1(78,44.373) 78.051,44.424 78.051,44.856 77.801,45.106 77.801,45.943 86.263,54.405 U3.1
  Inner Layer1 w0.2: v1(68.12,44.373) v1(78,44.373)
pads on no net: CAN_3. DIC. Display1.3 Display1.15 Display1.16 JTAG1.8 SD_TS. SWC. U1.1 U1.17 U1.48 U1.61 U1.62

## Polygon pours and split planes (outlines as drawn)
GND on Bottom Layer "GND_L04_P001" (solid, remove dead copper, pour order 1): 108,70 108,10 10,10 10,70
GND on Inner Layer1 "GND_L02_P002" (solid, remove dead copper, pour order 2): 10,70 108,70 108,10 10,10
+5V on Inner Layer2 "+5V_L03_P000" (solid, remove dead copper, pour order 0): 10,70 108,70 108,10 10,10
GND on Top Layer "GND_L01_P003" (solid, remove dead copper, pour order 3): 10,70 108,70 108,10 10,10

## Other copper
Top Layer:
  pour cut-out: 16.05,13.158 20.824,13.158 20.824,11.35 16.05,11.35
  text "1" at 16.454,11.754 h1
Inner Layer1:
  pour cut-out: 16.05,13.158 20.824,13.158 20.824,11.35 16.05,11.35
  text "2" at 17.354,11.754 h1
Inner Layer2:
  pour cut-out: 16.05,13.158 20.824,13.158 20.824,11.35 16.05,11.35
  text "3" at 18.554,11.754 h1
Bottom Layer:
  pour cut-out: 16.05,13.158 20.824,13.158 20.824,11.35 16.05,11.35
  text "4" at 19.754,11.754 h1

## Silkscreen, mask and mechanical layers (free items; w line width, h text height)
Top Overlay:
  drawing of 37 lines, arcs and shapes, not listed
Boardoutline (Mech42):
  the board outline again, w0.2

## Text inside footprints (layer, text, board x,y; h text height)
LED_Header: Bottom Overlay "1" at 37.12,63.8 h1.02 r180; Bottom Overlay "2" at 36.82,61.26 h1.02 r180; Bottom Overlay "34" at 80.58,61.2 h1.02 r180; Bottom Overlay "33" at 80.58,63.74 h1.02 r180